# Altium PCB Copy of PCB3.PcbDoc
Units mil, origin at the board's own origin, x right, y up, seen from the top; angles counter-clockwise.
Board outline 3000 x 1310 mil, 2 copper layers (Top Layer, Bottom Layer); 62 components, 43 nets, 192 pads, 53 vias.
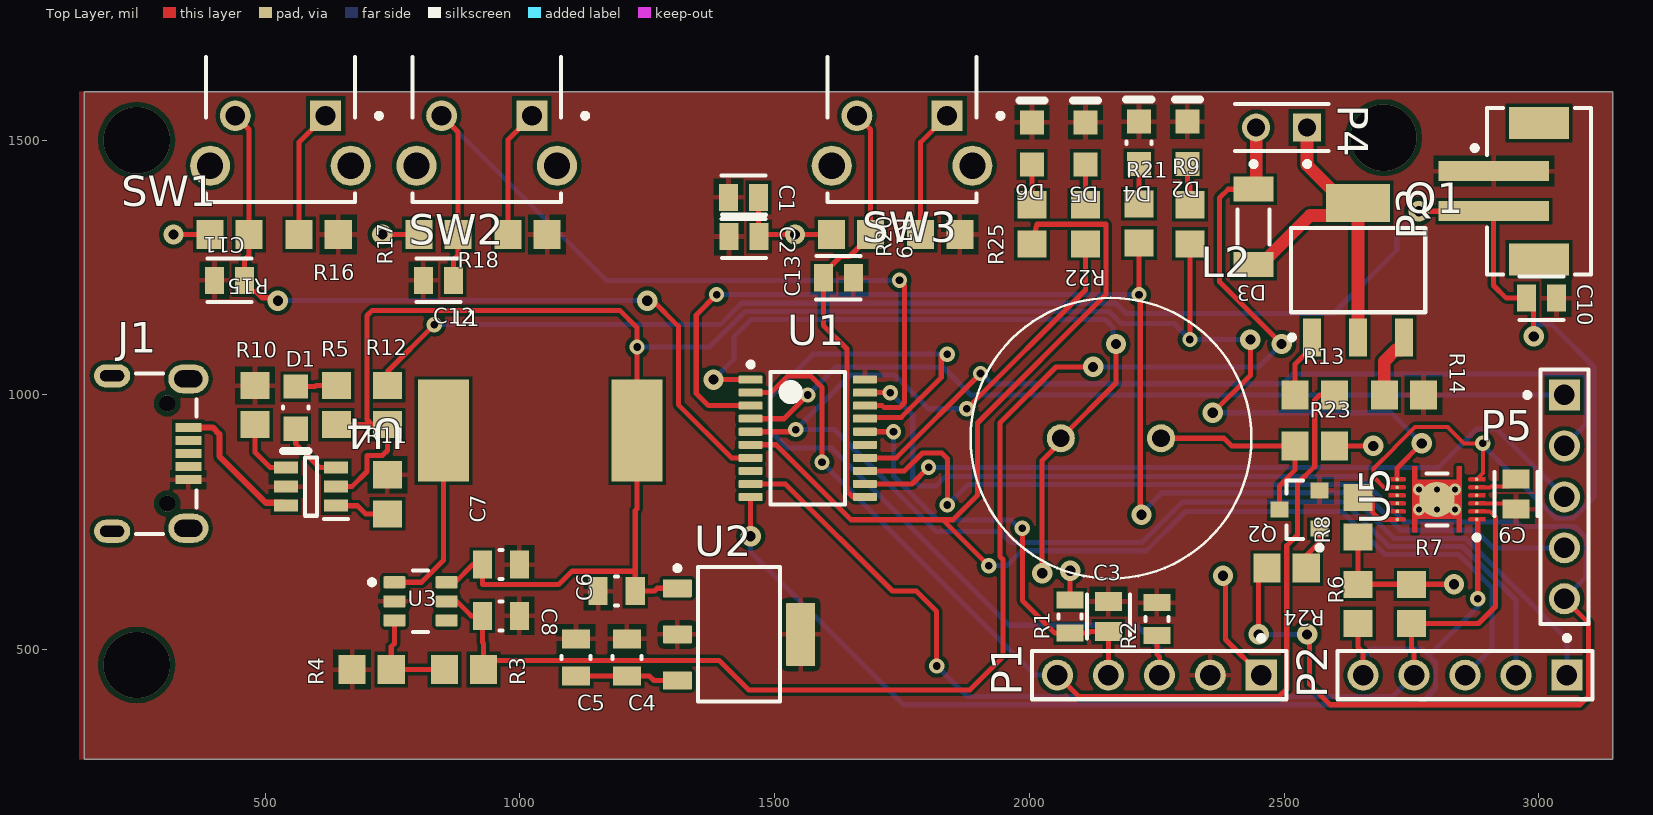
[diagram p0: Top Layer view]
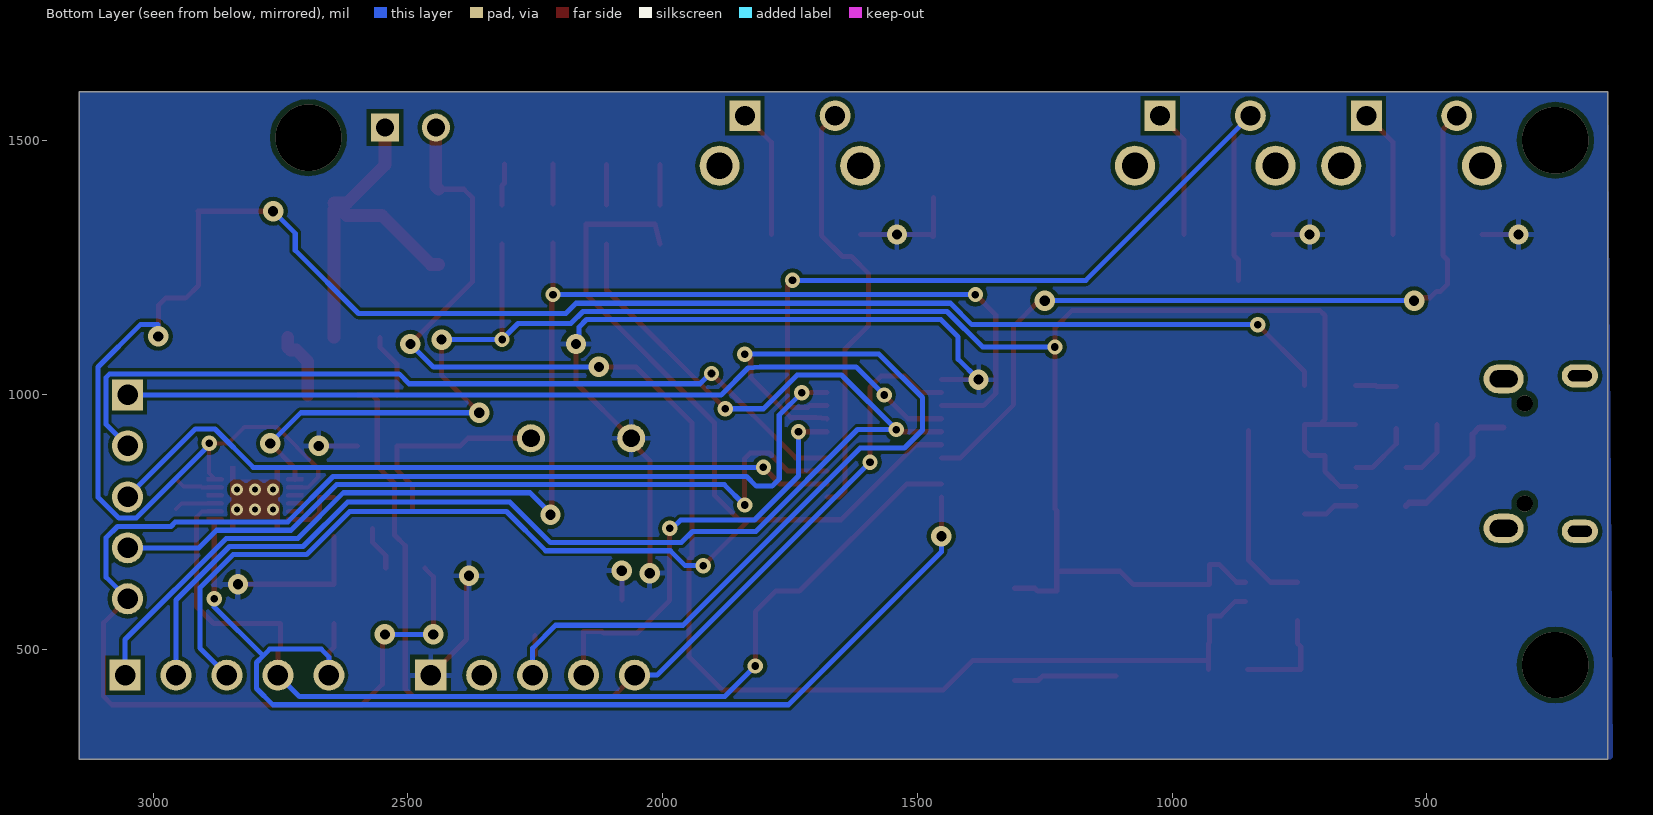
[diagram p1: Bottom Layer view, seen from below]

## Layer stack, top to bottom
Top Solder: solder mask 0.4, Solder Resist, Dk 3.5
Top Layer: signal copper 1.4
Dielectric 1: dielectric 12.6, FR-4, Dk 4.8
Bottom Layer: signal copper 1.4
Bottom Solder: solder mask 0.4, Solder Resist, Dk 3.5

## Board outline
145,285 3145,285 3145,1595 145,1595

## Design rules (kind name [scope] priority, off if disabled: settings)
Clearance [All] p1: gap=8 ignorepadtopadclearanceinfootprint=FALSE except(6: Arc-Arc Arc-Track Arc-SMDPad Arc-THPad Arc-Fill Arc-Poly Arc-Region Track-Track Track-SMDPad Track-THPad Track-Fill Track-Poly Track-Region SMDPad-SMDPad SMDPad-THPad SMDPad-Fill SMDPad-Poly SMDPad-Region THPad-THPad Fill-Fill Fill-Poly Fill-Region Poly-Poly Poly-Region Region-Region; 10: Fill-Hole Poly-Hole Region-Hole)
PolygonConnect [All] p1: connectstyle=Relief reliefconductorwidth=10 reliefentries=4 polygonreliefangle="90 Angle" airgapwidth=10
RoutingVias [All] p1: holewidth=15 width=30 viastyle="Through Hole" minholewidth=12 minwidth=20 maxholewidth=28 maxwidth=50
SolderMaskExpansion [All] p1: expansion=4 istentingtop=FALSE
Width [All] p1: maxlimit=30 minlimit=8 preferedwidth=10
30 further rules are at their usual default settings.

## Classes and differential pairs
component class MCU: LS

## Components (designator, comment, footprint, x,y, rotation, side; value= is the part's Value field where it differs from the comment)
C1 "10 uF" FP-C0805C-DG-MFG 1438.9,1387.66 r180 top value=10uF
C2 "0.1 uF" FP-C0805C-DG-MFG 1439.92,1311.06 r180 top value=10uF
C3 "1.1 nF" FP-C0805C-DG-MFG 2155,565 r90 top value=10uF
C4 "4.7uF" FP-CC0805-0_85-MFG 1210,485 r90 top value="100 nF"
C5 "470nF" FP-CC0805-0_85-MFG 1110,485 r90 top value="100 nF"
C6 "4.7uF" FP-CC0805-0_85-MFG 1190,615 r180 top value="100 nF"
C7 "1uF" FP-CC0805-0_85-MFG 962.65,667.02 r0 top value="100 nF"
C8 "4.7uF" FP-CC0805-0_85-MFG 962.65,566.46 r180 top value="100 nF"
C9 "0.47 uF" FP-C0805C-DG-MFG 2955,805.47 r270 top value=10uF
C10 "1 nF" FP-C0805C-DG-MFG 3005,1190 r0 top value=10uF
C11 "0.1uF" FP-C0805C-DG-MFG 430,1225 r180 top value=10uF
C12 "0.1uF" FP-C0805C-DG-MFG 840,1225 r180 top value=10uF
C13 "0.1uF" FP-C0805C-DG-MFG 1625,1230 r0 top value=10uF
D1 "LTST-C170KRKT" LTST-C170KRKT_V 560,975 r270 top
D2 "HSMG-C170" AVAG-HSMX-C170_V 2310,1495 r90 top
D3 "LS4148-GS18" FP-6_560-5006_01-4-MFG 2440,1330 r270 top value=4pF
D4 "LTST-C170KRKT" LTST-C170KRKT_V 2215,1495 r90 top
D5 "HSMG-C170" AVAG-HSMX-C170_V 2110,1493.66 r90 top
D6 "HSMG-C170" AVAG-HSMX-C170_V 2005,1493.66 r90 top
J1 "629105150521" 629105150521 235,885 r270 top
L1 "Bourns SRU1048-100Y" "Bourns SRU1048-100Y-Footprint-1" 1040,925 r0 top
L2 "Comment" BUZZER_PS1440P02BT 2160,915 r90 top
P1 "77311-462K05LF" FCI-77311-5_V 2255,450 r180 top
P2 "77311-462K05LF" FCI-77311-5_V 2855,450 r180 top
P3 "620302124022" 620302124022 3000,1400 r90 top
P4 "5-146280-2" TECO-5-146280-2_V 2495,1525 r180 top
P5 "77311-462K05LF" FCI-77311-5_V 3050,800 r270 top
Q1 "BSP89" INF-PG-SOT223_SC-73_M 2645,1245 r90 top
Q2 "MMBTA06LT1G" ONSC-SOT-23-3-318-08_V 2530,775 r180 top
R1 "47k" RESC2013X50X30LL20T20 2080,565 r90 top
R2 "1k" RESC2013X50X30LL20T20 2250,560 r270 top
R3 "Resistor 1k +/-1% 0805 125 mW" RESC2013X70X40ML20T20 890.31,460.97 r0 top value=1M
R4 "Resistor 1k +/-1% 0805 125 mW" RESC2013X70X40ML20T20 709.05,460.97 r0 top value=71.5k
R5 "Resistor 1k +/-1% 0805 125 mW" RESC2013X70X40ML20T20 640,980 r270 top value=470
R6 "Resistor 1k +/-1% 0805 125 mW" RESC2013X70X40ML20T20 2645,590 r90 top value=4.7k
R7 "Resistor 1k +/-1% 0805 125 mW" RESC2013X70X40ML20T20 2750,590 r90 top value=4.7k
R8 "Resistor 1k +/-1% 0805 125 mW" RESC2013X70X40ML20T20 2645,760 r270 top value=10k
R9 "Resistor 1k +/-1% 0805 125 mW" RESC2013X70X40ML20T20 2315,1335 r270 top value=470
R10 "Resistor 1k +/-1% 0805 125 mW" RESC2013X70X40ML20T20 480,980 r90 top value=10k
R11 "Resistor 1k +/-1% 0805 125 mW" RESC2013X70X40ML20T20 740,805 r90 top value=10k
R12 "Resistor 1k +/-1% 0805 125 mW" RESC2013X70X40ML20T20 740,980 r270 top value=0.01
R13 "Resistor 1k +/-1% 0805 125 mW" RESC2013X70X40ML20T20 2560,1000 r0 top value=220
R14 "Resistor 1k +/-1% 0805 125 mW" RESC2013X70X40ML20T20 2735,1000 r180 top value=10k
R15 "Resistor 1k +/-1% 0805 125 mW" RESC2013X70X40ML20T20 430,1315 r0 top value=10k
R16 "Resistor 1k +/-1% 0805 125 mW" RESC2013X70X40ML20T20 605,1315 r0 top value=1k
R17 "Resistor 1k +/-1% 0805 125 mW" RESC2013X70X40ML20T20 840,1315 r0 top value=10k
R18 "Resistor 1k +/-1% 0805 125 mW" RESC2013X70X40ML20T20 1015,1315 r0 top value=1k
R19 "Resistor 1k +/-1% 0805 125 mW" RESC2013X70X40ML20T20 1650,1315 r0 top value=10k
R20 "Resistor 1k +/-1% 0805 125 mW" RESC2013X70X40ML20T20 1825,1315 r0 top value=1k
R21 "Resistor 1k +/-1% 0805 125 mW" RESC2013X70X40ML20T20 2215,1336.61 r270 top value=470
R22 "Resistor 1k +/-1% 0805 125 mW" RESC2013X70X40ML20T20 2110,1335 r270 top value=470
R23 "Resistor 1k +/-1% 0805 125 mW" RESC2013X70X40ML20T20 2560,900 r180 top value=1k
R24 "Resistor 1k +/-1% 0805 125 mW" RESC2013X70X40ML20T20 2505,660 r0 top value=1k
R25 "Resistor 1k +/-1% 0805 125 mW" RESC2013X70X40ML20T20 2005,1335 r270 top value=470
SW1 "1825027-5" FP-1825027-5-0 530,1545 r180 top
SW2 "1825027-5" FP-1825027-5-0 935,1545 r180 top
SW3 "1825027-5" FP-1825027-5-0 1750,1545 r180 top
U1 "MSP430G2553IPW20" PW0020A_L 1565,915 r0 top
U2 "LM340MP-5.0/NOPB" DCY0004A_L 1430,530 r0 top
U3 "TLV61046ADBVT" FP-DBV0006A-MFG 805,595 r0 top
U4 "BQ21040DBVT" SOT95P280X145-6N 590,820 r180 top
U5 "BQ27441DRZR-G1A" FP-DRZ0012A-MFG 2800,795 r90 top

## Footprints (in the part's own frame and the unit in brackets; to place one, negate y for a bottom-side part, rotate by r counter-clockwise, add the part's x,y. Pads: shape width x height; smd on the part's side, far side on the other; paste and mask are expansions set on the pad)
620302124022 [mm] "2.00mm SMT Male Vertical Shrouded Header, 2p"
  rect 1x5.5 smd: 1(1,2.25) 2(-1,2.25)
  rect 1.6x3 smd: MP1(-3.4,0) MP2(3.4,0)
  silkscreen extent -4.15,-2.6 4.15,3.32, body extent -4,-2.5 4,4.51, height 6.77
629105150521 [mm] "Micro USB 2.0 SMT Type B Horizontal 5 Contacts High Current"
  rect 0.45x1.3 smd: 1(-1.3,2.9) 2(-0.65,2.9) 3(0,2.9) 4(0.65,2.9) 5(1.3,2.9)
  round 0.8 hole 0.8 unplated: MH1(-2.5,1.85) MH2(2.5,1.85)
  oval 1.15x1.8 hole 0.55 slot 1.2 at 90 deg: Shell(-3.875,-0.9) Shell(3.875,-0.9)
  oval 1.45x2 hole 0.85 slot 1.4 at 90 deg: Shell(-3.725,2.9) Shell(3.725,2.9)
  silkscreen extent -4,0.3 4,3.3, body extent -4,-3.3 4,3.3, height 2.75
AVAG-HSMX-C170_V [mm] "SMD, 2-Leads, Body 2x1.25mm, Height 0.8mm"
  rect 1.2x1.2 smd: 1(-1.05,0) 2(1.05,0)
  silkscreen extent 2.15,-0.62 2.15,0.62, body extent -1,-0.63 1,0.63, height 0.8
"Bourns SRU1048-100Y-Footprint-1" [mil]
  rect 100x200 smd: 1(190,5) 2(-190,5)
  body extent -197,-197 197,197, height 189
BUZZER_PS1440P02BT [mm]
  round 1.398 hole 0.89: 1(0,2.5) 2(0,-2.5)
  silkscreen extent -7,-7 7,7
DCY0004A_L [mm] "SOT223, 4-Leads, Body 6.7x3.7mm, Pitch 2.3mm, IPC High Density"
  rrect11% 1.45x0.9 smd: 1(-3.075,2.3) 2(-3.075,0) 3(-3.075,-2.3)
  rrect7% 1.45x3.15 smd: 4(3.075,0)
  silkscreen extent -3.2,-3.35 2.05,3.42, body extent -3.5,-3.25 3.5,3.25, height 1.62
FCI-77311-5_V [mm] "THD, 5-Leads, Body 12.7x2.4mm, Pitch 2.54mm"
  rect 1.55x1.55 hole 1.02: 1(-5.08,0)
  round 1.55 hole 1.02: 2(-2.54,0) 3(0,0) 4(2.54,0) 5(5.08,0)
  silkscreen extent -6.35,-1.97 6.35,1.2, body extent -6.35,-1.2 6.35,1.2, height 16.24
FP-6_560-5006_01-4-MFG [mm]
  rect 1.25x2 smd paste+0 mask+0: 1(-1.875,0) 2(1.875,0)
  silkscreen extent -3.25,-0.8 0.87,0.8, body extent -2.6,-1.1 2.6,1.1, height 0.25
FP-1825027-5-0 [mm]
  rect 1.54x1.54 hole 0.99 paste-1000 mask+0: 1(-2.25,-0.075)
  round 1.54 hole 0.99 paste-1000 mask+0: 2(2.25,-0.075)
  round 2 hole 1.3 paste-1000 mask+0: 3(-3.505,2.415) 4(3.505,2.415)
  silkscreen extent -5.03,-3 3.7,4.23, body extent -4.6,-4.34 4.6,4.33, height 0.25
FP-C0805C-DG-MFG [mm]
  rect 0.95x1.35 smd paste+0 mask+0: 1(-0.75,0) 2(0.75,0)
  silkscreen extent -1.11,-1.08 1.1,1.07, body extent -1.4,-0.85 1.4,0.85, height 0.25
FP-CC0805-0_85-MFG [mm]
  rect 0.95x1.4 smd paste+0 mask+0: 1(-0.925,0) 2(0.925,0)
  silkscreen extent -0.08,-0.73 0.08,0.73, body extent -1.6,-1.05 1.6,1.05, height 0.25
FP-DBV0006A-MFG [mm]
  rrect17% 1.1x0.6 smd paste+0 mask+0: 1(-1.3,0.95) 2(-1.3,0) 3(-1.3,-0.95) 4(1.3,-0.95) 5(1.3,0) 6(1.3,0.95)
  silkscreen extent -2.55,-1.53 0.38,1.53, body extent -1.95,-1.78 1.95,1.78, height 0.25
FP-DRZ0012A-MFG [mm]
  round 0.18 smd paste-1000 mask+0: 1(-1,-1.985) 2(-0.6,-1.985) 3(-0.2,-1.985) 4(0.2,-1.975) 5(0.6,-1.975) 6(1,-1.975) 7(1,1.985) 8(0.6,1.985) 9(0.2,1.985) 10(-0.2,1.975) 11(-0.6,1.975) 12(-1,1.975)
  round 1.755 smd paste-1000 mask+0: 13(0,0)
  Top Layer region: -1.65,1.225 1.65,1.225 1.65,0.975 0.975,0.975 0.975,-0.975 1.65,-0.975 1.65,-1.225 -1.65,-1.225 -1.65,-0.975 -0.975,-0.975 -0.975,0.975 -1.65,0.975 -1.65,1.225
  Top Layer region: -0.9,2.4 -0.9,1.65 -0.913,1.6 -0.95,1.563 -1,1.55 -1,1.55 -1.038,1.558 -1.071,1.579 -1.092,1.612 -1.1,1.65 -1.1,1.65 -1.1,2.4
  Top Layer region: -0.5,2.4 -0.5,1.65 -0.513,1.6 -0.55,1.563 -0.6,1.55 -0.6,1.55 -0.638,1.558 -0.671,1.579 -0.692,1.612 -0.7,1.65 -0.7,1.65 -0.7,2.4
  Top Layer region: -0.1,2.4 -0.1,1.65 -0.113,1.6 -0.15,1.563 -0.2,1.55 -0.2,1.55 -0.238,1.558 -0.271,1.579 -0.292,1.612 -0.3,1.65 -0.3,1.65 -0.3,2.4
  Top Layer region: 0.3,2.4 0.3,1.65 0.287,1.6 0.25,1.563 0.2,1.55 0.2,1.55 0.162,1.558 0.129,1.579 0.108,1.612 0.1,1.65 0.1,1.65 0.1,2.4
  Top Layer region: 0.7,2.4 0.7,1.65 0.687,1.6 0.65,1.563 0.6,1.55 0.6,1.55 0.562,1.558 0.529,1.579 0.508,1.612 0.5,1.65 0.5,1.65 0.5,2.4
  Top Layer region: 1.1,2.4 1.1,1.65 1.087,1.6 1.05,1.563 1,1.55 1,1.55 0.962,1.558 0.929,1.579 0.908,1.612 0.9,1.65 0.9,1.65 0.9,2.4
  Top Layer region: 0.9,-2.4 0.9,-1.65 0.908,-1.612 0.929,-1.579 0.962,-1.558 1,-1.55 1,-1.55 1.038,-1.558 1.071,-1.579 1.092,-1.612 1.1,-1.65 1.1,-1.65 1.1,-2.4
  Top Layer region: 0.5,-2.4 0.5,-1.65 0.508,-1.612 0.529,-1.579 0.562,-1.558 0.6,-1.55 0.6,-1.55 0.638,-1.558 0.671,-1.579 0.692,-1.612 0.7,-1.65 0.7,-1.65 0.7,-2.4
  Top Layer region: 0.1,-2.4 0.1,-1.65 0.108,-1.612 0.129,-1.579 0.162,-1.558 0.2,-1.55 0.2,-1.55 0.238,-1.558 0.271,-1.579 0.292,-1.612 0.3,-1.65 0.3,-1.65 0.3,-2.4
  Top Layer region: -0.3,-2.4 -0.3,-1.65 -0.292,-1.612 -0.271,-1.579 -0.238,-1.558 -0.2,-1.55 -0.2,-1.55 -0.162,-1.558 -0.129,-1.579 -0.108,-1.612 -0.1,-1.65 -0.1,-1.65 -0.1,-2.4
  Top Layer region: -0.7,-2.4 -0.7,-1.65 -0.692,-1.612 -0.671,-1.579 -0.638,-1.558 -0.6,-1.55 -0.6,-1.55 -0.562,-1.558 -0.529,-1.579 -0.508,-1.612 -0.5,-1.65 -0.5,-1.65 -0.5,-2.4
  Top Layer region: -1.1,-2.4 -1.1,-1.65 -1.092,-1.612 -1.071,-1.579 -1.038,-1.558 -1,-1.55 -1,-1.55 -0.962,-1.558 -0.929,-1.579 -0.908,-1.612 -0.9,-1.65 -0.9,-1.65 -0.9,-2.4
  silkscreen extent -2.02,-2.1 1.3,0.53, body extent -1.75,-2.5 1.75,2.5, height 0.25
INF-PG-SOT223_SC-73_M [mm] "SOT223, 4-Leads, Body 6.5x3.5mm, Pitch 2.3mm, IPC Low Density"
  rect 1.9x0.9 smd: 1(-3.35,2.3) 2(-3.35,0) 3(-3.35,-2.3)
  rect 1.9x3.2 smd: 4(3.35,0)
  silkscreen extent -3.47,-3.35 2.1,3.42, body extent -1.85,-3.35 1.85,3.35, height 1.8
LTST-C170KRKT_V [mm] "SMD, 2-Leads, Body 2x1.25mm"
  rect 1.2x1.2 smd: 1(-1.05,0) 2(1.05,0)
  silkscreen extent -0.05,-0.63 2.16,0.64, body extent -1,-0.63 1,0.63, height 1.2
ONSC-SOT-23-3-318-08_V [mm] "SOT23, 3-Leads, Body 2.92x1.3mm, Pitch 0.95mm"
  rect 0.9x0.8 smd: 1(-1,0.95) 2(-1,-0.95) 3(1,0)
  silkscreen extent -1.13,-1.46 0.65,2.02, body extent -0.65,-1.46 0.65,1.46, height 1.11
PW0020A_L [mm] "SOP, 20-Leads, Body 6.6x4.5mm, Pitch 0.65mm, IPC High Density"
  rrect25% 1.2x0.4 smd: 1(-2.85,2.925) 2(-2.85,2.275) 3(-2.85,1.625) 4(-2.85,0.975) 5(-2.85,0.325) 6(-2.85,-0.325) 7(-2.85,-0.975) 8(-2.85,-1.625) 9(-2.85,-2.275) 10(-2.85,-2.925) 11(2.85,-2.925) 12(2.85,-2.275) 13(2.85,-1.625) 14(2.85,-0.975) 15(2.85,-0.325) 16(2.85,0.325) 17(2.85,0.975) 18(2.85,1.625) 19(2.85,2.275) 20(2.85,2.925)
  silkscreen extent -2.97,-3.3 1.85,3.8, body extent -3.21,-3.25 3.21,3.25, height 1
RESC2013X50X30LL20T20 [mm] "Chip Resistor, 2-Leads, Body 2.00x1.25mm, IPC High Density"
  rect 0.85x1.35 smd: 1(-0.825,0) 2(0.825,0)
  silkscreen extent -0.1,-0.58 0.1,0.58, body extent -1.1,-0.72 1.1,0.72, height 0.5
RESC2013X70X40ML20T20 [mm] "Chip Resistor, 2-Leads, Body 2.2x1.35mm, IPC Low Density"
  rect 1.35x1.45 smd: 1(-0.975,0) 2(0.975,0)
  body extent -1.1,-0.67 1.1,0.67, height 0.7
SOT95P280X145-6N [mm]
  rect 1.2x0.6 smd: 1(-1.25,0.95) 2(-1.25,0) 3(-1.25,-0.95) 4(1.25,-0.95) 5(1.25,0) 6(1.25,0.95)
  silkscreen extent -1.85,-1.45 0.3,1.6, body extent -1.4,-1.45 1.4,1.45, height 1.45
TECO-5-146280-2_V [mm] "Connector, 2-Leads, Body 4.67x2.34mm, Pitch 2.54mm"
  rect 1.4x1.4 hole 0.89: 1(-1.27,0)
  round 1.4 hole 0.89: 2(1.27,0)
  silkscreen extent -2.34,-1.17 2.34,1.94, body extent -2.34,-1.17 2.34,1.17, height 5.33

## Part data
C1 C2 C3 C9 C10 C11 C12 C13: library part CMP-2007-03243-2, "CAP CER 10UF 10V X5R 0805", 3DS Part Number=220-00001, Capacitance=10uF, Manufacturer=Kemet, Manufacturer Part Number=C0805C106K8PACTU, Package=C0805C-DG, Temperature="-55°C to +85°C", Temperature Characteristic=X5R, Temperature Coefficient=15%, Temperature Range High=+85°C, Temperature Range Low=-55°C, Tolerance=10%, Voltage=10V, Automotive=No, Category=Cap, ComponentLink2Description=Datasheet, ComponentLink2URL=https://content.kemet.com/datasheets/KEM_C1006_X5R_SMD.pdf, Device Class L1="Passive Components", Device Class L2=Capacitors, Device Class L3="Ceramic Capacitors", Digikey Description="CAP CER 10UF 10V X5R 0805", Height=1.4mm, Ipc Land Pattern Name=CAPC200125X125, Lead Free=Yes, Material=Ceramic, Mouser Description="CAP CER 10UF 10V X5R 0805", Octopart=https://octopart.com/c0805c106k8pactu-kemet-98697, RoHS=TRUE, Voltage Rating=10V
C4 C5 C6 C7 C8: library part CMP-03422-000499-1, "CAP CER 0.1UF 50V X7R 0805", Capacitance="100 nF", Manufacturer=Yageo, Manufacturer Part Number=CC0805KRX7R9BB104, Package=CC0805-0.85, Temperature="-30°C to +85°C", Temperature Characteristic=X7R, Temperature Range High=+85°C, Temperature Range Low=-30°C, Tolerance=0.1, Voltage Rating="50 V", Automotive=No, Category=Cap, ComponentLink2Description=Datasheet, ComponentLink2URL=http://www.yageo.com/documents/recent/UPY-GPHC_Y5V_6.3V-to-50V_8.pdf, Device Class L1="Passive Components", Device Class L2=Capacitors, Device Class L3="Ceramic Capacitors", Digikey Description="CAP CER 0.1UF 50V X7R 0805", Footprint Url=http://www.yageo.com/exep/pages/download/literatures/UPY-C_GEN_24.pdf, Height=0.95mm, Ipc Land Pattern Name=CAPC200125X85, Lead Free=Yes, Material=Ceramic, Mouser Description="Multilayer Ceramic Capacitors MLCC - SMD/SMT 100nF 50V X7R 10%", Octopart=https://octopart.com/cc0805krx7r9bb104-yageo-192993, RoHS=TRUE
D1 D4: library part CMP-2000-07593-1, "LED Red, 75 mW, 54 mcd, -55 to 85 degC, 2-Pin SMD, RoHS, Tape and Reel", Case Code (Imperial)=0805, Case Code (Metric)=2012, Colour=Red, Forward Current=30mA, Forward Voltage=2V, Lens Colour=Colorless, Manufacturer=Lite-On, Max Operating Temperature=85degC, Min Operating Temperature=-55degC, Package Description="2-Pin Surface Mount Device, Body 2 x 1.25 mm", Package Quantity=1, Package Reference=C170KRKT, Power Dissipation=75mW, Test Current=20mA, Case\/Package=0805, Datasheet URL=http://optoelectronics.liteon.com/upload/download/DS-22-99-0150/LTST-C170KRKT.pdf, Datasheet Version="Rev. D, 11/2014", Depth=1.6mm, Dominant Wavelength=631nm, Height=1.1mm, Illumination Colour=Red, Lead Free=LeadFree, Length=3.2mm, Lens Style=Rectangular, Lens Transparency=Clear, Luminous Intensity=54mcd, Manufacturer URL=http://www.us.liteon.com/, Mount=SurfaceMount, Mounting Technology=SurfaceMount, Number of Elements=1, Number of LEDs=1, Number of Pins=2, Packaging=TapeandReel, Power Rating=75mW, Radiation Hardening=No, RoHSCompliant=True, Viewing Angle=130degrees, Wavelength=639nm, Width=1.25mm
D2 D5 D6: library part CMP-2000-05062-1, "Chip LED, Green, 2.2 V, -40 to 85 degC, 2-Pin SMD, Pb-Free, Tape and Reel", Forward Current If=20mA, Forward Voltage=2.2V, Forward Voltage VF Max=2.6V, LED Colour=Green, Manufacturer=Avago, Operating Temperature Max=85degC, Operating Temperature Min=-30degC, Operating Temperature Range=-30degCto+85degC, Opto Case Style=SMD, Package Description="2-Pin Surface Mount Device, Body 2 x 1.25 mm, Height 0.8 mm", Package Reference=HSMX-C170, Storage Temperature Min=-40degC, Bulb Size=1.25mmx1.4mm, Datasheet URL=https://datasheet.ciiva.com/29280/180495-da-01-en-chip-led-hsmg-c170-gelb-gruen-29280971.pdf, Datasheet Version=Oct-08, Dominant Wavelength=572nm, Dominant Wavelength Typ=572nm, External Depth=0.8mm, External Length / Height=2mm, External Width=1.25mm, Forward Current If Max=20mA, LED Mounting=SMD, LED Type=Standard, Lens Shape=Rectangular, Light Area Height=1mm, Luminous Intensity=15mcd, Luminous Intensity Min=4mcd, Luminous Intensity Typ=15mcd, Manufacturer URL=http://www.avagotech.com/, Mounting Type=SMD, MSL=MSL2A-4weeks, No. of Pins=2, Opto Mounting Orientation=Top, Packaging=CutTape, Peak Forward Current=20mA, Peak Wavelength=570nm, PIV Max=5V, Storage Temperature Max=85degC, SVHC=NoSVHC(16-Jun-2014), Viewing Angle=170deg, Voltage Vf Typ=2.2V, Wavelength Typ=570nm
D3: library part CMP-02539-000014-1, "DIODE GEN PURP 75V 150MA SOD80", Capacitance=4pF, Forward Current=300mA, Manufacturer=Vishay, Max Junction Temp=+175°C, Max Repetitive Reverse Voltage=100V, Max Surge Forward Current=2A, Package=6.560-5006.01-4, Peak Reverse Current=5uA, Reverse Voltage=75V, Temperature="to +175°C", Automotive=Yes, Automotive Grade="Grade 0", Category=Diode, ComponentLink2Description=Datasheet, ComponentLink2URL=http://www.vishay.com/docs/85561/ls4148.pdf, Device Class L1="Discrete Semiconductors", Device Class L2=Diodes, Device Class L3="Schottky Diodes", Digikey Description="DIODE GEN PURP 75V 150MA SOD80", Height=1.7mm, Lead Free=Yes, Manufacturer Part Number=LS4148-GS18, Mouser Description="In a Pack of 100, Vishay Switching Diode, 300mA 75V, 2-Pin SOD-80 LS4148-GS18", Octopart=https://octopart.com/ls4148-gs18-vishay-55507867, RoHS=TRUE, Temperature Range High=+175°C
J1: library part CMP-1502-03252-1, "Micro USB 2.0 Type B Receptacle WR-COM, Horizontal, SMT, with Pegs, High Current at Pin 1 & Pin 5", Contact Resistance=30mOhm, Manufacturer="Wurth Elektronik", Operating Temperature=-40to85degC, Rated Current=3A, Working Voltage=30VAC, Connector Type=MicroUSB2.0TypeB, Datasheet URL=https://katalog.we-online.de/em/datasheet/629105150521.pdf, Gender=Receptacle, Manufacturer URL=http://www.we-online.de, Mounting Technology=SMT, Orientation=Horizontal, Package Reference=629105150521, Packaging=TapeandReel, Part Number=629105150521, Publisher=WurthElektronik
L1: library part CMP-006-00021-1, "Inductor"
P1 P2 P5: library part CMP-1698-00006-1, "Male Header, Pitch 2.54 mm, 1 x 5 Position, Height 16.24 mm, Tail Length 3.05 mm,  / -65 to 125 degC, RoHS, Tape and Reel", Current Rating="1 A", Max Operating Temperature=85degC, Min Operating Temperature=-25degC, Package Quantity=500, ComponentLink1Description="Manufacturer URL", ComponentLink1URL=http://portal.fciconnect.com/, ComponentLink2Description=Datasheet, ComponentLink2URL=http://portal.fciconnect.com/Comergent//fci/drawing/77311.pdf, Contact Material=Brass, DatasheetVersion="Rev. CK, 07/2016", Gender=Female, PackageDescription="Male Header, Pitch 2.54 mm, 1 x 5 Position, Height 16.24 mm, Tail Length 3.05 mm", PackageReference=77311-5, Packaging="Tape and Reel", RoHSCompliant=True, Shielding=Shielded
P3: library part CMP-1502-00660-1, "Male Shrouded Header WR-WTB, SMT, Vertical, pitch 2 mm, 1 x 2 position", Contact Resistance=20mOhm, Manufacturer="Wurth Elektronik", Operating Temperature=-25to85degC, Working Voltage=100VAC, Datasheet URL=https://katalog.we-online.de/em/datasheet/6203xx124022.pdf, Gender=Male, Manufacturer URL=http://www.we-online.de, Mounting Technology=SMT, Orientation=Vertical, Package Reference=620302124022, Packaging=TapeandReel, Part Number=620302124022, Pitch=2mm, Position=1x2, Publisher=WurthElektronik
P4: library part CMP-2000-07492-1, "Male Header, Pitch 2.54 mm, 1 x 2 Position, Height 8.21 mm, Tail Length 3.05 mm, -65 to 105 degC, RoHS, Bulk", Case\/Package=100, Colour=Black, Current Rating=3A, Flammability Rating=UL94V-0, High Temperature Housing=Yes, Manufacturer="TE Connectivity", Max Current Rating=5A, Max Operating Temperature=105degC, Min Operating Temperature=-65degC, Package Description="Male Header, Pitch 2.54 mm, 1 x 2 Position, Height 8.21 mm, Tail Length 3.05 mm", Package Quantity=500, Approvals=CSA, Board Standoff=No(Without), Connector Type=Header, Contact Gender=Male, Contact Material=CopperAlloy, Contact Mating Length=0.23inch, Contact Plating=Matte, Contact Protection=No(Without), Contact Shape=Square, Datasheet URL=http://www.te.com/commerce/DocumentDelivery/DDEController?Action=showdoc&DocId=Customer+Drawing%7F146280%7FH1%7Fpdf%7FEnglish%7FENG_CD_146280_H1.pdf%7F5-146280-2, Datasheet Version="Rev. H1, 08/2016", Depth=2.34mm, Gasket=No(Without), High Speed Serial Data Connector=No, Housing Colour=Black, Housing Material=Polymer, Keyed=No, Length=4.67mm, Manufacturer URL=http://www.te.com/, Mating Alignment=No(Without), Mating Connector Lock=No(Without), Mating Post Length=0.23inch, Mount=ThroughHole, Mounting Technology=ThroughHole, Number of Contacts=2, Number of Positions=2, Number of Rows=1, Orientation=Straight, Package Reference=5-146280-2, Packaging=Carton, Panel Mount Retention=No(Without), PCB Mount Retention=Without, PCB Mounting Orientation=Vertical, PCB Thickness=0.063inch, Pitch=2.54mm, Radiation Hardening=No, RoHSCompliant=true, Row Spacing=2.54mm, Selectively Loaded=No(Without), Stabilizers=No(Without), Termination=ThroughHole, Termination Post Length=0.12inch
Q1: library part CMP-1149-00010-1, "N-Channel SIPMOS Small-Signal-Transistor, 240 V VDS, 0.35 A ID, -55 to 150 degC, PG-SOT223 (SC-73), Reel, Green", Manufacturer=Infineon, ComponentLink1Description="Manufacturer URL", ComponentLink1URL=http://www.infineon.com/, ComponentLink2Description=Datasheet, ComponentLink2URL=http://www.infineon.com/dgdl/BSP89_Rev2.2.pdf?folderId=db3a3043156fd573011622e10b5c1f67&fileId=db3a30433b47825b013b4b8a07f90d55, ComponentLink3Description="Package Specification", ComponentLink3URL=http://www.infineon.com/dgdl/SOT223-Package_Overview.pdf?folderId=db3a30431936bc4b0119530470b03c3d&fileId=db3a30431936bc4b0119531d40b93c5c, DatasheetVersion="Rev. 2.2", Green=TRUE, Halogen-free=TRUE, ID (max)="0.35Â A", IDpuls (max)="1.4Â A", Mode=Enhancement, Mounting Technology="Surface Mount", PackageDescription="4-Pin Small Outline Transistor Package, 6.5 x 3.5 mm Body, 2.3 mm Pitch", PackageReference="PG-SOT223 (SC-73)", PackageVersion=Apr-08, Packing=Reel, PartNumber=BSP89, Polarity=N, Ptot (max)="1.8Â W", QG="4.3Â nC", RDS (on) (max)="6,000 mOhm", RDS (on) (max) (@4.5V)="7,500 mOhm", RthJA (max)="115 K/W", VDS (max)="240 V", VGS(th) (max)="1.8Â V", VGS(th) (min)="0.8Â V"
Q2: library part CMP-1048-00619-1, "Driver Transistor, NPN Silicon, 3-Pin SOT-23, Pb-Free, Tape and Reel", Manufacturer="On Semiconductor", ComponentLink1Description="Manufacturer URL", ComponentLink1URL=http://www.onsemi.com/, ComponentLink2Description=Datasheet, ComponentLink2URL=http://www.onsemi.cn/pub_link/Collateral/MMBTA05LT1-D.PDF, ComponentLink3Description="Package Specification", ComponentLink3URL=http://www.onsemi.cn/pub_link/Collateral/318-08.PDF, DatasheetVersion="Rev. 8", fT Min (MHz)=100, IC Continuous (A)=0.5, Mounting Technology="Surface Mount", PackageDescription="3-Pin Small Outline Transistor, Body 2.92 x 1.3 mm, Pitch 0.95 mm", PackageReference=SOT-23-3-318-08, PackageVersion="Rev. AP, 11/2009", Packing="Tape and Reel", PartNumber=MMBTA06LT1G, Polarity=NPN, RoHS=TRUE
R1 R2: library part CMP-2001-04896-1, Manufacturer="Vishay Dale", Part Number=CRCW08050000Z0EA
R3 R4 R5 R6 R7 R8 R9 R10 R11 R12 R13 R14 R15 R16 R17 R18 R19 R20 R21 R22 R23 R24 R25: library part CMP-009-00010-4, "Chip Resistor, 1 KOhm, +/- 1%, 0.125 W, -55 to 155 degC, 0805 (2013 Metric)", Case/Package=0805, Max Operating Temperature=155°C, Min Operating Temperature=-55°C, Power=125mW, Tolerance=1%, Voltage Rating=150V, Mounting Technology=SM, Pins=2, RoHS Compliant=True
SW1 SW2 SW3: library part CMP-2000-05514-2, "SWITCH TACTILE SPST-NO 0.05A 24V", Contact Current Rating=50mA, Contact Resistance=100mΩ, Manufacturer="TE Connectivity", Operating Force=160gf, Temperature="-35°C to +85°C", Temperature Range High=+85°C, Temperature Range Low=-35°C, Voltage Rating Dc=24V, Automotive=No, Category=Switch, ComponentLink2Description=Datasheet, ComponentLink2URL=https://www.te.com/commerce/DocumentDelivery/DDEController?Action=showdoc&DocId=Customer+Drawing%7F1825027%7FG4%7Fpdf%7FEnglish%7FENG_CD_1825027_G4.pdf%7F1825027-5, Device Class L1=Electromechanical, Device Class L2=Switches, Device Class L3="Pushbutton Switches", Digikey Description="SWITCH TACTILE SPST-NO 0.05A 24V", Electromechanical Life=100000Cycles, Height=7.31mm, Lead Free=Yes, Manufacturer Part Number=1825027-5, Mount="Through Hole", Mouser Description="Tactile Switches R/A TACT 160G PB SWITCH", Octopart=https://octopart.com/1825027-5-te+connectivity-46510878, Package=1825027-5, RoHS=TRUE, Throw Configuration=SPST-NO
U1: library part CMP-0365-00585-2, "16 MHz Mixed Signal Microcontroller with 16 KB Flash, 512 B SRAM and 24 GPIOs, -40 to 85 degC, 20-pin SOP (PW), Green (RoHS & no Sb/Br)", Frequency(MHz)=16, Manufacturer="Texas Instruments", Temp Sensor=Yes, ADC="10-bit SAR", ADC Channels=8, Brown Out Reset=Yes, Cap touch I/O=Yes, Code_JEDEC=MO-153, Comparators=Yes, ComponentLink1Description="Manufacturer URL", ComponentLink1URL=http://www.ti.com/, ComponentLink2Description=Datasheet, ComponentLink2URL=http://www.ti.com/general/docs/lit/getliterature.tsp?genericPartNumber=MSP430G2553&fileType=pdf, ComponentLink3Description="Package Specification", ComponentLink3URL=http://www.ti.com.cn/cn/lit/ml/mpds362/mpds362.pdf, DatasheetVersion=SLAS735G, Eco-Plan="Green (RoHS & no Sb/Br)", Flash(KB)=16, GPIO=24, Mounting Technology="Surface Mount", PackageDescription="20-Pin Plastic Small Outline, Body 6.5 x 4.4 mm, 0.65 mm Pitch", PackageReference=PW0020A, PackageVersion=4040064-5/G, PartNumber=MSP430G2553IPW20, SRAM(B)=512, SubFamily="Value Line", Timers - 16-bit=2, USCI_A (UART/LIN/IrDA/SPI)=1, USCI_B (I2C & SPI)=1, Watchdog=Yes
U2: library part CMP-0062-01784-3, "Series 3-Terminal Positive Regulators, 4-pin SOT-223, Pb-Free", Manufacturer="Texas Instruments", PackageTopMarking=XYTT*N00A, PowerWise=N, Code_IPC=SOT223-4, Code_JEDEC=TO-261-AA, ComponentLink1Description="Datasheet URL", ComponentLink1URL=http://www.ti.com/general/docs/lit/getliterature.tsp?genericPartNumber=LM340-N&fileType=pdf, CompType="LDO IC", PackageDescription="Molded SOT-223, 6.50 x 3.56 x 1.6mm Body, 4 Lead, 2.3mm Pitch", PackageReference=DCY0004A, PinCount=4, RoHS=Y
U3: library part CMP-04918-000055-1, "IC REG BOOST ADJ SOT23-6", Manufacturer="Texas Instruments", Max Junction Temp=+125°C, Max Supply Voltage=5.5V, Min Supply Voltage=1.8V, Nominal Supply Current=110uA, Output Current=980mA, Output Voltage=3.3-28V, Package=DBV0006A, Switching Frequency=1050kHz, Temperature="-40°C to +125°C", Temperature Range Low=-40°C, Automotive=No, Category=IC, ComponentLink2Description=Datasheet, ComponentLink2URL=http://www.ti.com/lit/ds/symlink/tlv61046a.pdf, Device Class L1="Integrated Circuits (ICs)", Device Class L2="Power Management ICs", Device Class L3="Voltage Regulators - Switching", Digikey Description="IC REG BOOST ADJ SOT23-6", Height=1.45mm, Ipc Land Pattern Name=SOT95P280X145-6, Lead Free=Yes, Manufacturer Part Number=TLV61046ADBVT, Max Duty Cycle=90%, Number Of Outputs=1, Octopart=https://octopart.com/tlv61046adbvt-texas+instruments-81856327, Output Type=AdjustableProgrammable, RoHS=TRUE, Standoff Height=0mm, Switching Topology=Boost, Temperature Range High=+125°C
U4: "Integrated Circuit", Manufacturer_Name="Texas Instruments", Mouser Part Number=595-BQ21040DBVT, Arrow Part Number=BQ21040DBVT, Arrow Price/Stock=https://www.arrow.com/en/products/bq21040dbvt/texas-instruments, Datasheet Link=http://www.ti.com/lit/gpn/bq21040, Height=1.45mm, Manufacturer_Part_Number=BQ21040DBVT, Mouser Price/Stock=https://www.mouser.co.uk/ProductDetail/Texas-Instruments/BQ21040DBVT/?qs=cttFivMKqWxXmJjs8S2Pcw%3D%3D
U5: library part CMP-04911-000008-1, "IC BATT FUEL GAUGE LI-ION 12SON", Ambient Temperature Range High=+85°C, Ambient Temperature Range Low=-40°C, Manufacturer="Texas Instruments", Max Supply Voltage=4.5V, Min Supply Voltage=2.45V, Nominal Supply Current=93uA, Output Voltage=1.8V, Package=DRZ0012A, Temperature="-40°C to +85°C", Automotive=No, Category=IC, ComponentLink2Description=Datasheet, ComponentLink2URL=http://www.ti.com/lit/gpn/bq27441-g1, Device Class L1="Integrated Circuits (ICs)", Device Class L2="Power Management ICs", Device Class L3="Battery Management", Digikey Description="IC BATT FUEL GAUGE LI-ION 12SON", Height=1mm, Lead Free=Yes, Manufacturer Part Number=BQ27441DRZR-G1A, Mouser Description="System-Side Impedance Track? Battery Fuel (Gas) Gauge 12-SON -40 to 85", Number Of Cells=1, Number Of Outputs=1, Octopart=https://octopart.com/bq27441drzr-g1a-texas+instruments-30555829, RoHS=TRUE, Standoff Height=0mm, Temperature Range High=+85°C, Temperature Range Low=-40°C

## Via types
v1: diameter 40, hole 20, Top Layer to Bottom Layer, 23 vias
v2: diameter 30, hole 15, Top Layer to Bottom Layer, 21 vias
v3: diameter 23.62, hole 11.81, Top Layer to Bottom Layer, 6 vias
v4: diameter 130, hole 130, Top Layer to Bottom Layer, 3 vias

## Nets (pads, with @x,y where several pads share a name; then routed paths per layer and width w, separated by ;. In a path a pad name is that pad's centre, name@x,y a point inside that pad or via, vN(x,y) a via of type N, cw(c..) or ccw(c..) an arc to the next point about the centre after c; other vN are vias at no path point)
+3.3V: C4.1 C5.1 U2.3 | length 202.7
  Top Layer w10: C5.1 C4.1 1254,448.58 1263.13,439.45 U2.3
+3V3: C1.1 C2.1 L2.1 P1.1 R1.2 R6.2 R7.2 R8.2 R15.1 R17.1 R19.1 R23.1 U1.1 | length 2492.1
  Top Layer w10: v1(320,1315) R15.1 ; v1(730,1315) R17.1 ; v1(1379.84,1030.16) U1.1 ; C1.1 1468.43,1312.08 C2.1 1473.38,1315 v1(1540,1315) R19.1 ; v1(2025,650) 2025,871.57 2065,911.57 L2.1 2170,1023.43 v1(2170,1100) ; R1.2 v1(2080,655) ; v1(2380,645) 2385,640 2385,520 P1.1 ; R23.1 v1(2675,900) ; R8.2 R6.2 R7.2 v1(2833.39,628.39)
  Bottom Layer w10: v1(1379.84,1030.16) 1419.85,1070.16 1419.85,1113.73 1454.11,1148 2149.37,1148 2164.26,1133.11 2164.26,1105.74 v1(2170,1100)
+5V: J1.1 U4.6 | length 280.4
  Top Layer w12: J1.1 396.79,936.18 410,922.97 410,880 501.59,788.41 534.98,788.41 U4.6
+12V: C8.2 D3.1 P4.2 R3.2 U3.5 | length 2872
  Top Layer w10: U3.5 876,595 904.54,566.46 C8.2 926.23,514.47 928.7,512 R3.2@928.7,479 ; R3.2 R3.2@928.7,479 ; v1(2125,1055) 2052,1055 1942,945 1942,683 1948,677 1948,486 1883,421 1449,421 1391,479 R3.2@928.7,479 ; D3.1 2390,1403.82 2373,1386.82 2373,1222 v1(2495,1100)
  Top Layer w25: D3.1 2445,1408.82 P4.2
  Bottom Layer w10: v1(2125,1055) 2450,1055 v1(2495,1100)
+BATT: C10.1 P3.2 R12.1 U5.6 U5.8 | length 3803.8
  Top Layer w8: U5.8 2696.38,818.62 2675.81,839.19 2675.81,855.56 2716.28,896.02 2716.28,896.53 2756.75,937 2821,937 2853,905 v2(2890,905) 2890,864.61 2890,846.61 U5.6
  Top Layer w10: R12.1 740,1046 v2(832,1138) ; v1(2764.37,1360.63) P3.2@2911,1360.63 ; P3.2 P3.2@2911,1360.63 ; v1(2990,1115) 2989.17,1115.83 2989.17,1176.3 C10.1 2936,1190 2911,1215 P3.2@2911,1360.63
  Bottom Layer w10: v2(832,1138) 1393,1138 1435,1180 2170,1180 2190,1160 2597,1160 2721,1284 2721,1317.26 v1(2764.37,1360.63) ; v2(2890,905) 2890,901.29 3032.81,758.49 3067.19,758.49 3108,799.29 3108,1055 3025,1138 2990,1138 v1(2990,1115)
CHG: D1.2 U4.3 | length 128.2
  Top Layer w10: D1.2 560,904 606.6,857.4 U4.3
"CTL FAN": P1.5 R13.2 U1.2 | length 2050.8
  Top Layer w10: U1.2 1493,1004.57 1525.43,1037 1571,1037 1593,1015 v2(1593,868) ; P1.5 2097,408 2490,408 2505,423 2505,704 2526,725 2526,826 2560,860 2560,990 2570,1000 R13.2
  Bottom Layer w10: v2(1593,868) 2011,450 P1.5
GND: C1.2 C2.2 C3.2 C4.2 C5.2 C6.2 C7.2 C8.1 C9.2 C10.2 C11.2 C12.2 C13.2 D2.2 D4.2 D5.2 D6.2 J1.5 P1.2 P3.1 Q2.2 R2.1 R4.1 R10.2 R11.2 R14.1 R16.2 R18.2 R20.2 U1.20 U2.2 U2.4 U3.2 U4.5 U5.3 | length 81.5
  Top Layer w8: U5.3 2943.82,787.13 C9.2
GPBATT: R8.1 U5.12 | length 111.6
  Top Layer w10: R8.1 2673,798.39 2673,770 2687.37,755.63 U5.12
"I2C SCL": P2.4 R7.1 U1.9 U5.2 | length 2054.2
  Top Layer w8: U5.2 2903.62,771.38 2915,760
  Top Layer w10: U1.9 1521,825.43 1731.43,615 1778,615 1818,575 v2(1818,468) ; P2.4 2755,498 2750,503 R7.1 2881.61,551.61 2915,585 2915,760
  Bottom Layer w10: v2(1818,468) 1878,408 2713,408 P2.4
"I2C SDA": P2.5 R6.1 U1.10 U5.1 | length 2249.3
  Top Layer w10: v1(1452.8,722.8) U1.10 ; R6.1 2645,505 2655,495 P2.5 ; U5.1 2880,753.8 v2(2880,600)
  Bottom Layer w10: v1(1452.8,722.8) 1452.8,692.2 1620,525 1753,392 2765,392 2797,424 2797,475 2784,488 ; P2.5 2655,486 2670,501 2771,501 2784,488 ; v2(2880,600) 2880,584 2784,488
NetC9_1: C9.1 U5.5 | length 84
  Top Layer w8: U5.5 2904.25,818.62 2905.93,820.3 2940.3,820.3 C9.1
NetD1_1: D1.1 R5.1 | length 80.8
  Top Layer w10: D1.1 598,1016.34 600.05,1018.39 R5.1
NetD2_1: D2.1 R9.1 | length 82.3
  Top Layer w10: D2.1 2310,1416 2315,1411 R9.1
NetD3_2: D3.2 P4.1 Q1.2 Q1.4 | length 728.6
  Top Layer w25: D3.2 2454.76,1256.18 2550.57,1351.99 2620.1,1351.99 Q1.4@2638.6,1370.49 ; P4.1 2545,1451.3 2619.41,1376.89 Q1.4@2632.2,1376.89 ; Q1.2 2645,1364.09 Q1.4@2638.6,1370.49 ; Q1.4@2632.2,1376.89 Q1.4 Q1.4@2638.6,1370.49 ; Q1.4@2632.2,1376.89 Q1.4@2638.6,1370.49
NetD4_1: D4.1 R21.1 | length 78.7
  Top Layer w10: R21.1 D4.1
NetD5_1: D5.1 R22.1 | length 78.9
  Top Layer w10: R22.1 D5.1
NetD6_1: D6.1 R25.1 | length 78.9
  Top Layer w10: R25.1 D6.1
NetL1_2: L1.2 U3.1 | length 368.6
  Top Layer w10: U3.1 807,632.4 850,675.4 L1.2
NetQ1_1: Q1.1 R13.1 | length 126.7
  Top Layer w10: R13.1 2521.61,1060.59 2554.45,1093.43 Q1.1
NetQ1_3: Q1.3 R14.2 | length 136
  Top Layer w25: R14.2 2696.61,1066.04 2718.78,1088.21 2730.34,1088.21 2735.55,1093.43 Q1.3
NetQ2_1: Q2.1 R24.2 | length 88.4
  Top Layer w10: R24.2 2543.39,685 2569.37,710.98 Q2.1
NetQ2_3: L2.2 Q2.3 R23.2 | length 407.2
  Top Layer w10: L2.2 2382,915 2397,900 R23.2 2521.61,852.98 2490.63,822 Q2.3
NetR3_1: R3.1 R4.2 U3.3 | length 203.8
  Top Layer w10: U3.3 753.82,512.39 747.43,506 R4.2 R3.1
NetR10_1: R10.1 U4.4 | length 127.4
  Top Layer w10: R10.1 480,887.4 510,857.4 U4.4
NetR11_1: R11.1 U4.1 | length 107.4
  Top Layer w10: U4.1 681,782.6 696.98,766.61 R11.1
NetR16_1: R16.1 SW1.1 | length 254.5
  Top Layer w10: R16.1 566.61,1495.98 SW1.1
NetR18_1: R18.1 SW2.1 | length 252.4
  Top Layer w10: R18.1 976.61,1500.98 SW2.1
NetR20_1: R20.1 SW3.1 | length 254.5
  Top Layer w10: R20.1 1786.61,1495.98 SW3.1
P1.1: P2.1 R21.2 U1.3 | length 2735.5
  Top Layer w10: v2(1386,1197) 1346,1157 1346,1002.98 1370,978.98 U1.3 ; R21.2 v2(2215,1197) 2217.5,1194.5 2217.5,767.5 v1(2220,765)
  Bottom Layer w10: v2(1386,1197) v2(2215,1197) ; v1(2220,765) 2220,768 2260,808 2626.5,808 2715.99,718.5 2856.49,718.5 3055,520 P2.1
P1.2: P5.1 U1.4 | length 1661.2
  Top Layer w10: U1.4 1518.39,953.39 v2(1565,1000)
  Bottom Layer w10: v2(1565,1000) 1620,1055 1809.04,1055 1832.29,1052.71 1885,1000 P5.1
P1.3: P2.2 R22.2 U1.5 | length 2683.2
  Top Layer w10: U1.5 1537.39,927.8 v2(1541.59,932) ; v2(1877,973) 2110,1206 R22.2
  Bottom Layer w10: v2(1877,973) 1801.86,973 1735.86,1039 1648.59,1039 v2(1541.59,932) 1617.2,932 1817.1,732.1 1941.35,732.1 1963.17,710.27 2220.28,710.27 2300,790 2618,790 2705.49,702.5 2849.87,702.5 2955,597.37 P2.2
P1.4: P2.3 R25.2 U1.6 | length 2752.1
  Top Layer w10: U1.6 1502.8,902.2 1650,755 1830,755 ; v2(1920,665) 1830,755 ; R25.2 2015,1335 2150,1335 2150,1197 1898,945 1898,803 1850,755 1830,755
  Bottom Layer w10: v2(1920,665) 1955.72,665 1985,694.27 2229.28,694.27 2306.31,771.31 2614.06,771.31 2698.87,686.5 2843.24,686.5 2908,621.75 2908,503 P2.3
P1.5: C11.1 R15.2 SW1.2 U1.7 | length 1570.2
  Top Layer w10: SW1.2 468.39,1520.98 R15.2 468.39,1273.86 459.53,1265 C11.1 459.53,1217.13 473.23,1203.43 481.1,1203.43 493.79,1190.74 519.26,1190.74 v1(525,1185) ; v1(1250,1185) 1261,1185 1311,1135 1311,981 1415.39,876.61 U1.7
  Bottom Layer w10: v1(525,1185) v1(1250,1185)
P1.6: P5.2 U1.14 | length 1654.5
  Top Layer w10: U1.14 1738.59,876.61 v2(1903.97,1042)
  Bottom Layer w10: v2(1903.97,1042) 1906.4,1042 1926.4,1022 2497.47,1022 2516.98,1041.51 3085.07,1041.51 3092,1034.58 3092,942 P5.2
P2.3: C13.1 R19.2 SW3.2 U1.11 | length 856.1
  Top Layer w10: SW3.2 1688.39,1520.98 R19.2 1688.39,1313.03 1646.87,1271.52 1629.11,1271.52 1595.47,1237.87 C13.1 1595.47,1136.53 1642,1090 1642,811 1653.16,799.84 U1.11
P2.4: P5.3 U1.12 | length 1472.4
  Top Layer w10: U1.12 1769.55,825.43 v2(1802.12,858)
  Bottom Layer w10: v2(1802.12,858) 2803.4,858 2878.4,933 2917,933 P5.3
P2.5: P5.4 U1.13 | length 1550.8
  Top Layer w10: U1.13 1755.02,851.02 1790,886 1828,886 1839,875 v2(1839,784)
  Bottom Layer w10: v2(1839,784) 1879,824 2640,824 2729.49,734.5 2875.3,734.5 2909.8,700 P5.4
P2.6: P5.5 R24.1 U1.19 | length 2873
  Top Layer w10: U1.19 v2(1727,1004.57) ; v1(2450,530) 2450,643.39 R24.1 ; v1(2545,530) 2550,525 2550,432 2590,392 3081,392 3097,408 3097,553 P5.5
  Bottom Layer w10: v2(1727,1004.57) 1771,960.57 1771,835 1785,821 1816,821 1835,840 2646.63,840 2735.63,751 2753.79,751 2754.29,750.5 2956.49,750.5 2965,742 3070,742 3092,720 3092,642 P5.5 ; v1(2450,530) v1(2545,530)
P2.7: C12.1 R17.2 SW2.2 U1.18 | length 1699.9
  Top Layer w10: SW2.2 878.39,1515.98 R17.2 878.39,1273.86 869.53,1265 C12.1 ; U1.18 1711.02,978.98 1715,975 1745,975 1755,985 1755,1215 v2(1745,1225)
  Bottom Layer w10: SW2.2 1169.37,1225 v2(1745,1225)
TDIO: C3.1 P1.4 R1.1 U1.16 | length 862.3
  Top Layer w10: U1.16 v2(1733.2,927.8) ; v2(1986.19,738.27) 1986.19,596.33 2050,532.52 R1.1 2116,532.52 2118.95,535.47 C3.1 P1.4
  Bottom Layer w10: v2(1733.2,927.8) 1733.2,840.8 1819.5,754.5 1964.55,754.5 1980.78,738.27 v2(1986.19,738.27)
TEST: P1.3 R2.2 U1.17 | length 1763.1
  Top Layer w10: U1.17 1698.61,956 1748.63,956 1827,1034.37 1827,1080 v2(1839,1080) ; R2.2 2250,491 2255,486 P1.3
  Bottom Layer w10: v2(1839,1080) 1575,1080 1490,995 1490,931 1525,896 1612,896 1960,548 2210,548 2255,503 P1.3
VSYS: C6.1 C7.1 L1.1 R5.2 R9.2 R12.2 U2.1 U3.6 U4.2 U5.7 | length 4246.6
  Top Layer w10: U4.2 670,820 700,850 700,881 730,881 740,891 R12.2 710,941.61 ; R5.2 710,941.61 ; U3.6 873,632.4 907.62,667.02 C7.1 926.23,628 1076,628 1102,654 1226.42,654 ; U2.1 1269.56,620.55 1264,615 C6.1 1226.42,654 ; v2(2315,1108.71) R9.2 ; v1(2360,965) 2433.71,1038.71 v1(2433.71,1108.71) ; U5.7 2721.83,856.83 v1(2770,905) ; 710,941.61 700,951.61 700,1156 710,1166 1196,1166 1230,1132 v2(1230,1094) L1.1 1230,776.58 1226.42,773 1226.42,654
  Bottom Layer w10: v2(1230,1094) 1371.63,1094 1441.63,1164 2156,1164 2180,1140 2283.71,1140 v2(2315,1108.71) v1(2433.71,1108.71) ; v1(2360,965) 2710,965 v1(2770,905)
pads on no net: J1.2 J1.3 J1.4 J1.MH1 J1.MH2 J1.Shell P3.MP1 P3.MP2 SW1.3 SW1.4 SW2.3 SW2.4 SW3.3 SW3.4 U1.8 U1.15 U3.4 U5.4 U5.9 U5.10 U5.11 U5.13
copper on no net:
  other v3: 2764.57,775.32 2800,775.32 2835.43,775.32 2764.57,814.69 2800,814.69 2835.43,814.69
  other v4: 247.75,470 247.75,1500 2695,1505

## Polygon pours and split planes (outlines as drawn)
GND on Top Layer "GND" (solid, pour order 1): 135,1595 3145,1595 3145,285 135,285
+3V3 on Bottom Layer "+3V3" (solid, pour order 2): 145,1595 3145,1595 3145,1205 3145,285 135,285

## Silkscreen, mask and mechanical layers (free items; w line width, h text height)
Mechanical 4:
  the board outline again, w10

## Text inside footprints (layer, text, board x,y; h text height)
J1: Top 3D Body "PCB Edge" at 105.08,936.18 h16 r270